# EAGLE board Digital BMS Slave board  (EAGLE 9.5.1)
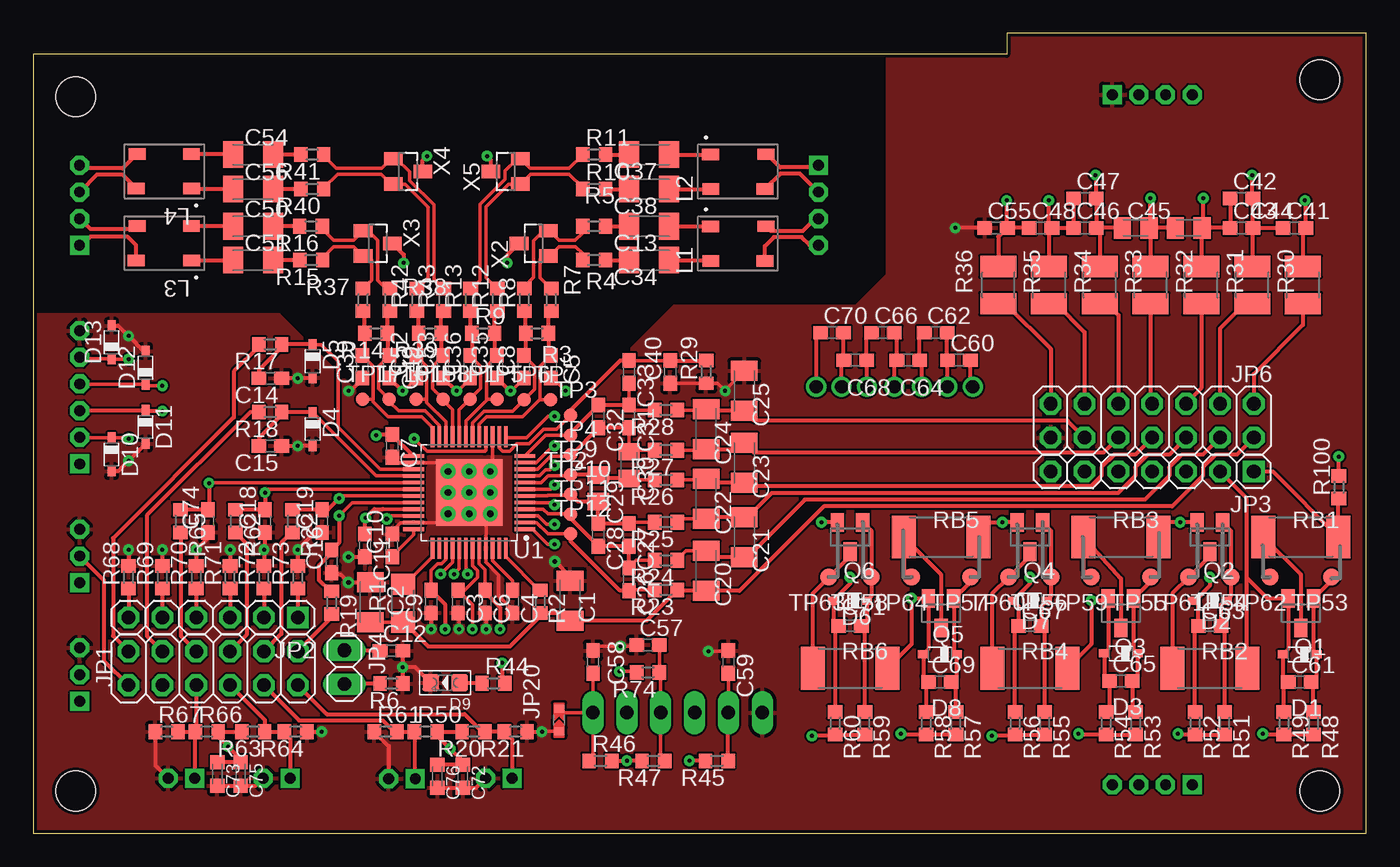
[diagram p0: board, top side]
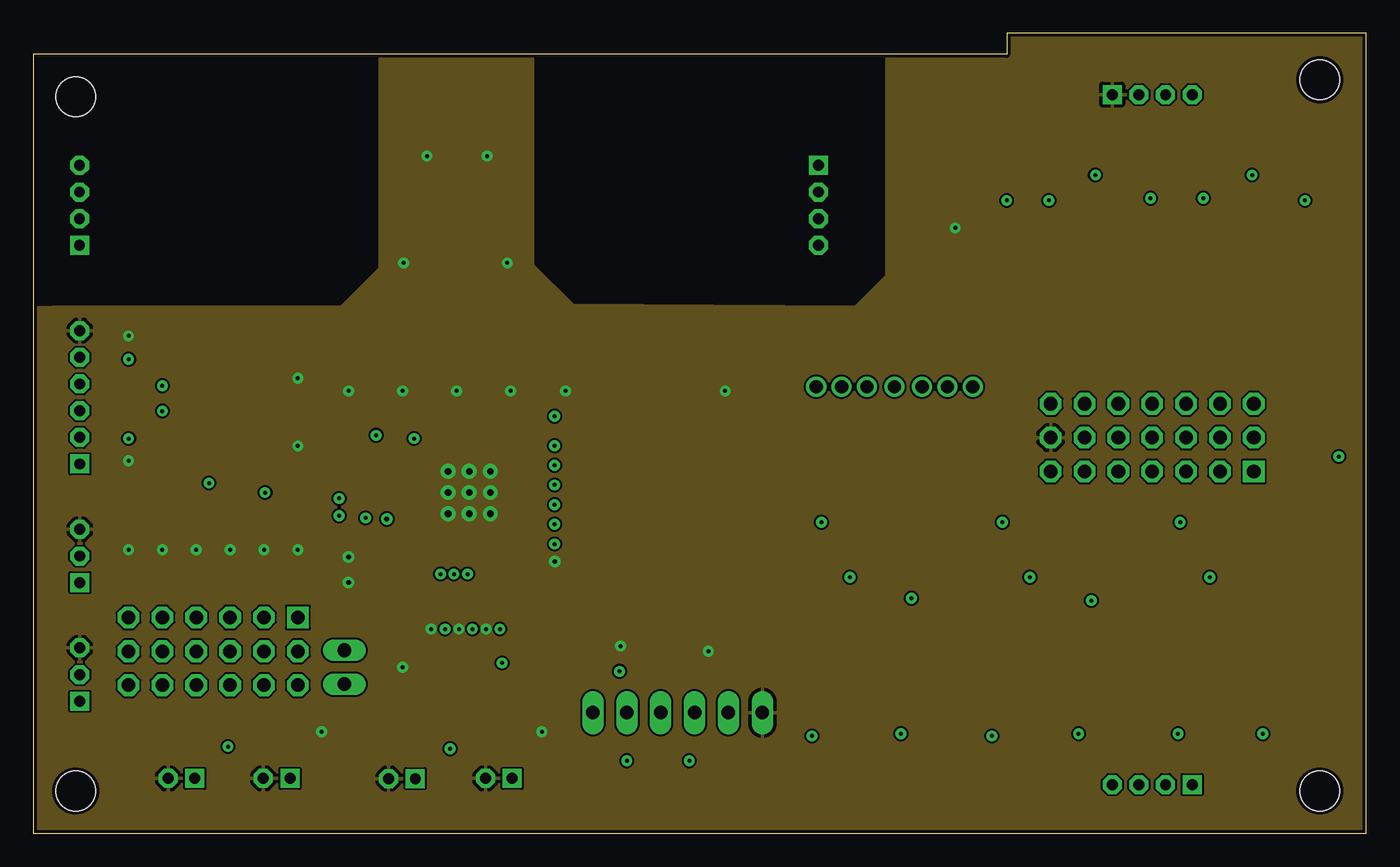
[diagram p1: board, inner layer GND_plane]
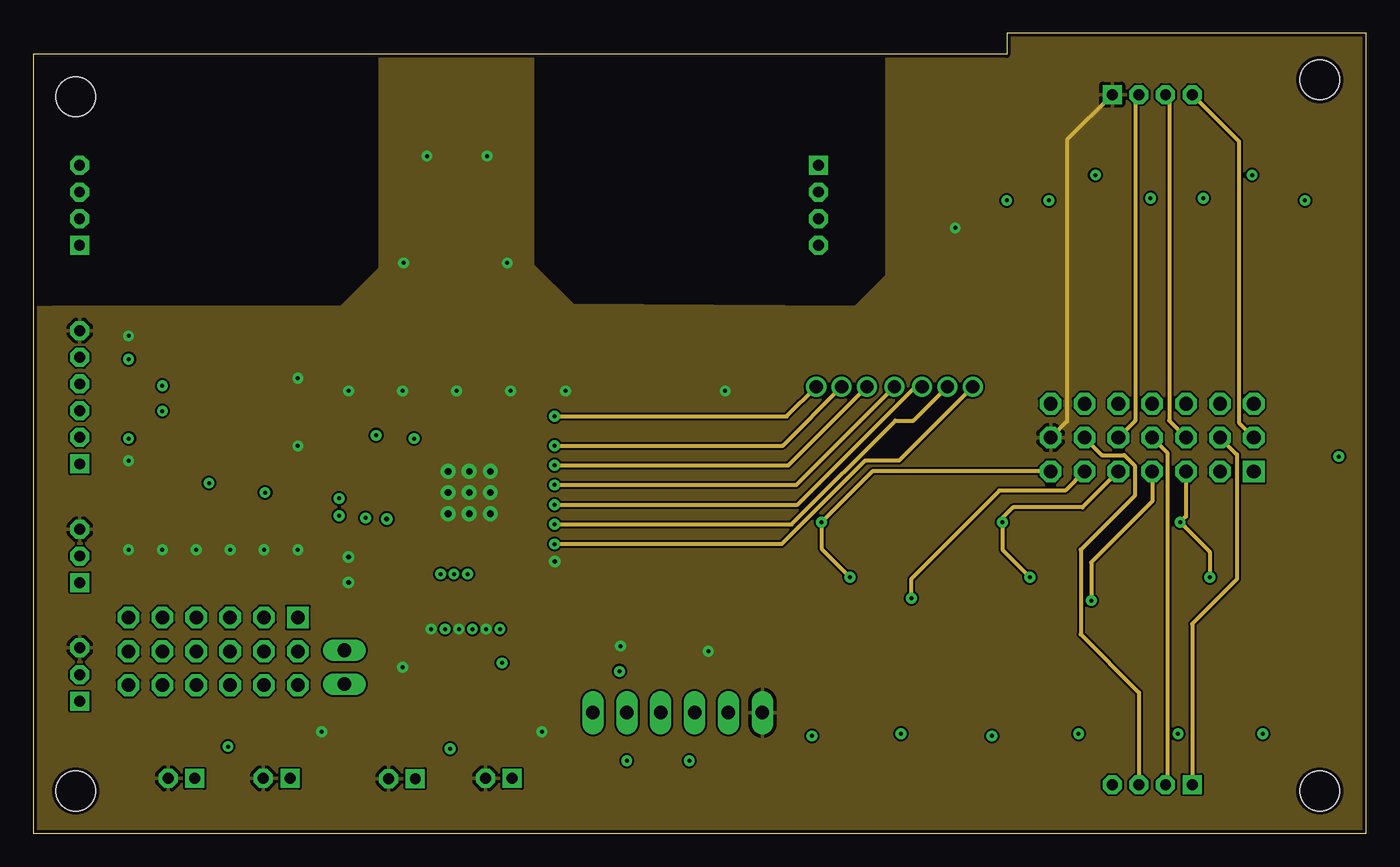
[diagram p2: board, inner layer Signal]
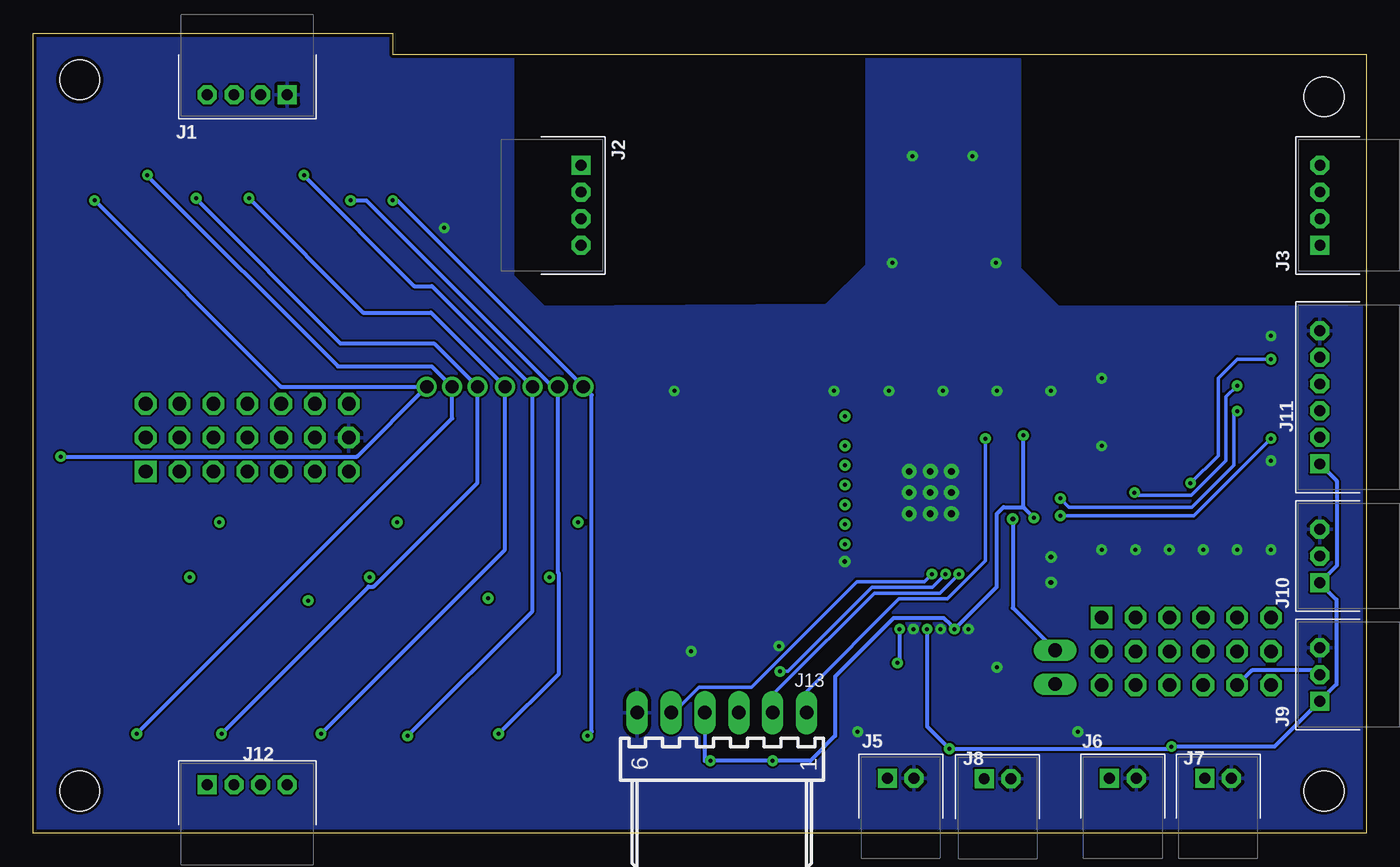
[diagram p3: board, bottom side, seen from below]

Size 100 x 60 mm. Coordinates in mm from the lower left corner, seen from the top.
Outline: 0,0 100,0 100,60 73.03,60 73.03,58.42 0,58.41 0,0
Copper layers (1+2*15+16): Top 0.035mm / dielectric 0.11mm / GND_plane 0.035mm / dielectric 1.13mm / Signal 0.035mm / dielectric 0.11mm / Bottom 0.035mm
Design rules "Pcb_Way_design_rules": minimum track width 6mil, minimum drill 0.3mm, track to track 6mil, track to pad 6mil, pad to pad 6mil, via to via 6mil, smd to smd 6mil, copper to edge 10mil, drill to drill 8mil, minimum pad ring 12mil, minimum via ring 10mil, stop-mask expansion 4mil, vias tented up to drill 25mil, thermal gap 10mil
Holes 3 mm at 3.17,3.17 96.52,3.17 96.52,56.52 3.17,55.24

## Footprints (pad centres in the part's own frame; a part is rotated, then mirrored left to right if it is on the bottom)
C1206K = smd 1.5 x 2: 1 -1.5,0; 2 1.5,0
C0603 = smd 1.1 x 1: 1 -0.85,0; 2 0.85,0
C0805K = smd 1.3 x 1.6: 1 -1,0; 2 1,0
C0603K-X = smd 1.05 x 1.08: 1 -0.875,0; 2 0.875,0
SOD323_ST = smd 0.8 x 0.6: A 1.25,0; C -1.25,0
LED-0805 = smd 1.27 x 1.27: + -1.079,0; - 1.079,0
S4B-PH-K = drill 0.813 square: 1 -3,0 | drill 0.813 octagon: 2 -1,0; 3 1,0; 4 3,0
S2B-PH-K = drill 0.813 square: 1 -1,0 | drill 0.813 octagon: 2 1,0
S3B-PH-K = drill 0.813 square: 1 -2,0 | drill 0.813 octagon: 2 0,0; 3 2,0
S6B-PH-K = drill 0.813 square: 1 -5,0 | drill 0.813 octagon: 2 -3,0; 3 -1,0; 4 1,0; 5 3,0; 6 5,0
7395-06 = drill 1.016 long: 1 6.35,0; 2 3.81,0; 3 1.27,0; 4 -1.27,0; 5 -3.81,0; 6 -6.35,0
2X06 = drill 1.016 octagon: 1 -6.35,-1.27; 2 -6.35,1.27; 3 -3.81,-1.27; 4 -3.81,1.27; 5 -1.27,-1.27; 6 -1.27,1.27; 7 1.27,-1.27; 8 1.27,1.27; 9 3.81,-1.27; 10 3.81,1.27; 11 6.35,-1.27; 12 6.35,1.27
1X06 = drill 1.016 square: 1 -6.35,0 | drill 1.016 octagon: 2 -3.81,0; 3 -1.27,0; 4 1.27,0; 5 3.81,0; 6 6.35,0
1X07 = drill 1.016 square: 1 -7.62,0 | drill 1.016 octagon: 2 -5.08,0; 3 -2.54,0; 4 0,0; 5 2.54,0; 6 5.08,0; 7 7.62,0
1X02 = drill 1.016 long: 1 -1.27,0; 2 1.27,0
2X07 = drill 1.016 octagon: 1 -7.62,-1.27; 2 -7.62,1.27; 3 -5.08,-1.27; 4 -5.08,1.27; 5 -2.54,-1.27; 6 -2.54,1.27; 7 0,-1.27; 8 0,1.27; 9 2.54,-1.27; 10 2.54,1.27; 11 5.08,-1.27; 12 5.08,1.27; 13 7.62,-1.27; 14 7.62,1.27
SOLDER_BRIDGE = smd 0.592 x 0.746: 1 -0.85,0; 2 0.85,0
ACT45B = smd 0.857 x 1.265: 1 1.297,2.054; 2 -1.303,2.046; 3 -1.297,-2.014; 4 1.303,-2.106
SOT23 = smd 1 x 1.4: 1 -0.95,-1.1; 2 0.95,-1.1; 3 0,1.1
R1206 = smd 1.6 x 1.803: 1 -1.422,0; 2 1.422,0
R0603 = smd 1 x 1.1: 1 -0.85,0; 2 0.85,0
R0603-X = smd 1 x 1.1: 1 -0.85,0; 2 0.85,0
R1210 = smd 1.6 x 2.7: 1 -1.4,0; 2 1.4,0
R2512 = smd 1.8 x 3.2: 1 -2.8,0; 2 2.8,0
TP1MM_MASK = smd 1.016 x 1.016: 1 0,0
TP1.27MM = smd 1.27 x 1.27: 1 0,0
HTQFP48-9X9MM-VIA = smd 1.559 x 0.28: 1 -4.178,2.75; 2 -4.178,2.25; 3 -4.178,1.75; 4 -4.178,1.25; 5 -4.178,0.75; 6 -4.178,0.25; 7 -4.178,-0.25; 8 -4.178,-0.75; 9 -4.178,-1.25; 10 -4.178,-1.75; 11 -4.178,-2.25; 12 -4.178,-2.75; 25 4.178,-2.75; 26 4.178,-2.25; 27 4.178,-1.75; 28 4.178,-1.25; 29 4.178,-0.75; 30 4.178,-0.25; 31 4.178,0.25; 32 4.178,0.75; 33 4.178,1.25; 34 4.178,1.75; 35 4.178,2.25; 36 4.178,2.75 | smd 0.28 x 1.559: 13 -2.75,-4.178; 14 -2.25,-4.178; 15 -1.75,-4.178; 16 -1.25,-4.178; 17 -0.75,-4.178; 18 -0.25,-4.178; 19 0.25,-4.178; 20 0.75,-4.178; 21 1.25,-4.178; 22 1.75,-4.178; 23 2.25,-4.178; 24 2.75,-4.178; 37 2.75,4.178; 38 2.25,4.178; 39 1.75,4.178; 40 1.25,4.178; 41 0.75,4.178; 42 0.25,4.178; 43 -0.25,4.178; 44 -0.75,4.178; 45 -1.25,4.178; 46 -1.75,4.178; 47 -2.25,4.178; 48 -2.75,4.178 | smd 5 x 5: 49 0,0 | drill 0.5: 491 -1.587,1.587; 492 0,1.587; 493 1.587,1.587; 494 -1.587,0; 495 0,0; 496 1.587,0; 497 -1.587,-1.587; 498 0,-1.587; 499 1.587,-1.587

## Placement (x,y rotation side)
C1  0.33u/50V  [C1206K]  40.27,17.46 270 top
C2  0.33u/50V  [C1206K]  25.28,17.34 90 top
C3  2.2u/10V  [C0603]  31.87,17.38 270 top
C4  2.2u/16V  [C0603]  35.96,17.38 270 top
C5  51p  [C0603]  38.82,34.99 90 top
C6  2.2u/16V  [C0603]  33.89,17.38 270 top
C7  2.2u/16V  [C0603]  26.93,29.05 270 top
C8  51p  [C0603]  36.8,34.99 90 top
C9  2.2u/16V  [C0603]  29.84,17.38 270 top
C10  2.2u/16V  [C0603]  26.93,21.59 90 top
C11  2.2u/16V  [C0603]  24.88,21.59 270 top
C12  1u/16V  [C0603]  26.87,13.69 0 top
C13  2.2n  [C1206K]  46.2,45.53 180 top
C14  1u/16V  [C0603]  17.78,34.13 180 top
C15  1u/16V  [C0603]  17.78,29.05 180 top
C16  1u/16V  [C0603]  22.38,20.4 90 top
C18  1u/16V  [C0603]  17.38,23.42 90 top
C19  1u/16V  [C0603]  21.67,23.42 90 top
C20  0.1u/100V  [C1206K]  50.48,19.68 270 top
C21  0.1u/100V  [C1206K]  53.34,22.23 270 top
C22  0.1u/100V  [C1206K]  50.48,25.08 270 top
C23  0.1u/100V  [C1206K]  53.34,27.78 270 top
C24  0.1u/100V  [C1206K]  50.48,30.32 270 top
C25  0.1u/100V  [C1206K]  53.34,33.18 270 top
C26  0.47u/16V  [C0603]  44.69,19.05 270 top
C27  0.47u/16V  [C0603]  44.69,22.38 270 top
C28  0.33u/16V  [C0603]  42.39,22.38 270 top
C29  1u/16V  [C0805K]  42.39,25.88 270 top
C30  1u/16V  [C0805K]  44.69,27.62 270 top
C31  0.47u/16V  [C0603]  44.69,31.27 270 top
C32  0.33u/16V  [C0603]  42.39,31.27 270 top
C33  0.47u/16V  [C0603]  44.69,34.61 270 top
C34  2.2n  [C1206K]  46.2,43 180 top
C35  51p  [C0603]  34.79,34.99 90 top
C36  51p  [C0603]  32.77,34.99 90 top
C37  2.2n  [C1206K]  46.2,50.91 180 top
C38  2.2n  [C1206K]  46.2,48.31 180 top
C39  51p  [C0603]  24.69,34.99 90 top
C40  0.47u/16V  [C0603]  47.78,34.61 90 top
C41  0.47u/16V  [C0603]  94.61,45.4 0 top
C42  0.33u/16V  [C0603]  90.65,47.62 0 top
C43  0.47u/16V  [C0603]  90.65,45.4 0 top
C44  1u/16V  [C0805K]  86.68,45.4 0 top
C45  1u/16V  [C0805K]  82.71,45.4 0 top
C46  0.33u/16V  [C0603]  78.9,45.4 0 top
C47  0.47u/16V  [C0603]  78.9,47.62 0 top
C48  0.47u/16V  [C0603]  75.56,45.4 0 top
C49  51p  [C0603]  26.71,34.99 90 top
C50  2.2n  [C1206K]  16.48,45.53 0 top
C51  2.2n  [C1206K]  16.48,43 0 top
C52  51p  [C0603]  28.73,34.99 90 top
C53  51p  [C0603]  30.75,34.99 90 top
C54  2.2n  [C1206K]  16.48,50.91 0 top
C55  0.47u/16V  [C0603]  72.23,45.4 0 top
C56  2.2n  [C1206K]  16.48,48.31 0 top
C57  51p  [C0603]  46.12,14.13 0 top
C58  1nF  [C0603]  41.99,12.86 270 top
C59  1nF  [C0603]  52.15,12.86 270 top
C60  1u/16V  [C0603]  69.45,35.48 0 top
C61  1u/16V  [C0603]  95.01,11.35 0 top
C62  1u/16V  [C0603]  67.71,37.54 0 top
C63  1u/16V  [C0603]  88.27,15.56 0 top
C64  1u/16V  [C0603]  65.64,35.48 0 top
C65  1u/16V  [C0603]  81.6,11.43 0 top
C66  1u/16V  [C0603]  63.74,37.54 0 top
C67  1u/16V  [C0603]  74.77,15.56 0 top
C68  1u/16V  [C0603]  61.67,35.48 0 top
C69  1u/16V  [C0603]  68.02,11.35 0 top
C70  1u/16V  [C0603]  59.93,37.54 0 top
C71  1u/16V  [C0603]  61.28,15.56 0 top
C72  1u/16V  [C0603K-X]  32.23,4.29 270 top
C73  1u/16V  [C0603K-X]  13.81,4.45 270 top
C74  1u/16V  [C0603]  13.1,23.42 90 top
C75  1u/16V  [C0603K-X]  15.56,4.45 270 top
C76  1u/16V  [C0603K-X]  30.32,4.29 270 top
D1  6.2V  [SOD323_ST]  95.01,13.41 180 top
D2  6.2V  [SOD323_ST]  88.27,17.46 180 top
D3  6.2V  [SOD323_ST]  81.6,13.49 180 top
D4  6.2V  [SOD323_ST]  20.95,30.32 270 top
D5  6.2V  [SOD323_ST]  20.95,35.4 270 top
D6  6.2V  [SOD323_ST]  61.28,17.46 180 top
D7  6.2V  [SOD323_ST]  74.77,17.46 180 top
D8  6.2V  [SOD323_ST]  68.02,13.41 180 top
D9  GREEN  [LED-0805]  30.9,11.3 180 top
D10  6.2V  [SOD323_ST]  5.87,28.42 270 top
D11  6.2V  [SOD323_ST]  8.41,30.48 270 top
D12  6.2V  [SOD323_ST]  8.41,34.92 90 top
D13  6.2V  [SOD323_ST]  5.87,36.83 90 top
J1  S4B-PH-K  [S4B-PH-K]  83.95,55.4 180 bottom
J2  S4B-PH-K  [S4B-PH-K]  58.9,47.1 270 bottom
J3  S4B-PH-K  [S4B-PH-K]  3.47,47.1 90 bottom
J5  S2B-PH-K  [S2B-PH-K]  34.92,4.13 0 bottom
J6  S2B-PH-K  [S2B-PH-K]  18.26,4.13 0 bottom
J7  S2B-PH-K  [S2B-PH-K]  11.11,4.13 0 bottom
J8  S2B-PH-K  [S2B-PH-K]  27.66,4.1 0 bottom
J9  S3B-PH-K  [S3B-PH-K]  3.49,11.91 90 bottom
J10  S3B-PH-K  [S3B-PH-K]  3.49,20.8 90 bottom
J11  S6B-PH-K  [S6B-PH-K]  3.49,32.7 90 bottom
J12  S4B-PH-K  [S4B-PH-K]  83.95,3.65 0 bottom
J13  MOLEX22-12-406205-7068  [7395-06]  48.34,9.05 0 bottom
JP1  [2X06]  13.49,12.38 0 top
JP2  [1X06]  13.49,16.19 180 top
JP3  1x7  [1X07]  83.95,27.14 180 top
JP4  [1X02]  23.34,12.46 270 top
JP6  2x7  [2X07]  83.95,30.95 180 top
JP20  SOLDER_BRIDGE  [SOLDER_BRIDGE]  39.45,8.49 90 top
L1  100uH  [ACT45B]  52.87,44.23 90 top
L2  100uH  [ACT45B]  52.87,49.63 90 top
L3  100uH  [ACT45B]  9.82,44.25 270 top
L4  100uH  [ACT45B]  9.82,49.65 270 top
Q1  BSS123  [SOT23]  95.09,16.51 180 top
Q2  BSS123  [SOT23]  88.27,22.23 180 top
Q3  BSS123  [SOT23]  81.6,16.51 180 top
Q4  BSS123  [SOT23]  74.77,22.23 180 top
Q5  BSS123  [SOT23]  68.1,16.51 180 top
Q6  BSS123  [SOT23]  61.28,22.23 180 top
R1  47, 0.25W  [R1206]  27.74,17.26 270 top
R2  100  [R0603]  38.02,17.38 270 top
R3  10k  [R0603]  37.8,37.5 0 top
R4  10  [R0603]  42.08,43 0 top
R5  10  [R0603]  42.08,45.53 0 top
R6  100k  [R0603]  26.87,11.23 180 top
R7  43  [R0603]  38.86,40.02 90 top
R8  43  [R0603]  36.84,40.02 90 top
R9  10k  [R0603]  33.76,37.5 0 top
R10  10  [R0603]  42.08,48.31 0 top
R11  10  [R0603]  42.08,50.91 0 top
R12  43  [R0603]  34.82,40.02 90 top
R13  43  [R0603]  32.8,40.02 90 top
R14  10k  [R0603]  25.72,37.5 180 top
R15  10  [R0603]  20.85,43 180 top
R16  10  [R0603]  20.83,45.53 180 top
R17  1k  [R0603]  17.78,36.67 180 top
R18  1k  [R0603]  17.78,31.59 180 top
R19  1k  [R0603]  22.38,17.3 270 top
R20  100k  [R0603]  33.02,7.62 180 top
R21  [R0603-X]  36.2,7.62 180 top
R22  1k  [R0603]  19.45,23.42 270 top
R23  47  [R0603]  47.47,18.26 180 top
R24  47  [R0603]  47.47,20.48 180 top
R25  47  [R0603]  47.47,23.34 180 top
R26  47  [R0603]  47.47,26.51 180 top
R27  47  [R0603]  47.47,28.73 180 top
R28  47  [R0603]  47.47,31.75 180 top
R29  47  [R0603]  50.48,34.61 90 top
R30  10, 1/4W  [R1210]  95.25,41.12 90 top
R31  10, 1/4W  [R1210]  91.44,41.12 90 top
R32  10, 1/4W  [R1210]  87.63,41.12 90 top
R33  10, 1/4W  [R1210]  83.82,41.12 90 top
R34  10, 1/4W  [R1210]  80.01,41.12 90 top
R35  10, 1/4W  [R1210]  76.2,41.12 90 top
R36  10, 1/4W  [R1210]  72.39,41.12 90 top
R37  43  [R0603]  24.73,40.02 90 top
R38  43  [R0603]  26.75,40.02 90 top
R39  10k  [R0603]  29.76,37.5 180 top
R40  10  [R0603]  20.93,48.31 180 top
R41  10  [R0603]  20.93,50.91 180 top
R42  43  [R0603]  28.77,40.02 90 top
R43  43  [R0603]  30.78,40.02 90 top
R44  1k  [R0603]  34.51,11.26 0 top
R45  10k  [R0603]  51.28,5.44 180 top
R46  10k  [R0603]  42.55,5.44 0 top
R47  10k  [R0603]  46.51,5.44 180 top
R48  1k  [R0603]  96.04,8.26 270 top
R49  100  [R0603]  93.82,8.26 270 top
R50  100k  [R0603]  29.45,7.62 0 top
R51  1k  [R0603]  89.38,8.26 270 top
R52  100  [R0603]  87.15,8.26 270 top
R53  1k  [R0603]  82.71,8.26 270 top
R54  100  [R0603]  80.49,8.26 270 top
R55  1k  [R0603]  75.88,8.26 270 top
R56  100  [R0603]  73.66,8.26 270 top
R57  1k  [R0603]  69.22,8.26 270 top
R58  100  [R0603]  66.99,8.26 270 top
R59  1k  [R0603]  62.39,8.26 270 top
R60  100  [R0603]  60.17,8.26 270 top
R61  [R0603-X]  26.43,7.62 0 top
R62  1k  [R0603]  15.16,23.42 270 top
R63  10k  [R0603]  16.51,7.62 180 top
R64  [R0603-X]  19.68,7.62 180 top
R65  1k  [R0603]  11.03,23.42 270 top
R66  10k  [R0603]  13.02,7.62 0 top
R67  [R0603-X]  10,7.62 0 top
R68  10k  [R0603]  7.14,19.21 90 top
R69  10k  [R0603]  9.68,19.21 90 top
R70  10k  [R0603]  12.22,19.21 90 top
R71  10k  [R0603]  14.76,19.21 90 top
R72  10k  [R0603]  17.3,19.21 90 top
R73  10k  [R0603]  19.84,19.21 90 top
R74  100  [R0603]  46.12,12.06 180 top
R100  100  [R0603]  97.95,25.96 90 top
RB1  20  [R2512]  95.09,22.23 0 top
RB2  20  [R2512]  88.27,12.38 0 top
RB3  20  [R2512]  81.6,22.23 0 top
RB4  20  [R2512]  74.77,12.38 0 top
RB5  20  [R2512]  68.1,22.23 0 top
RB6  20  [R2512]  61.28,12.38 0 top
TP1  TEST_PAD-[1MM]  [TP1MM_MASK]  32.77,32.54 0 top
TP2  TEST_PAD-[1MM]  [TP1MM_MASK]  40.32,29.87 180 top
TP3  TEST_PAD-[1MM]  [TP1MM_MASK]  40.32,31.35 0 top
TP4  TEST_PAD-[1MM]  [TP1MM_MASK]  40.32,28.39 0 top
TP5  TEST_PAD-[1MM]  [TP1MM_MASK]  34.79,32.54 0 top
TP6  TEST_PAD-[1MM]  [TP1MM_MASK]  36.8,32.5 0 top
TP7  TEST_PAD-[1MM]  [TP1MM_MASK]  38.82,32.5 0 top
TP8  TEST_PAD-[1MM]  [TP1MM_MASK]  30.75,32.54 0 top
TP9  TEST_PAD-[1MM]  [TP1MM_MASK]  40.32,26.91 0 top
TP10  TEST_PAD-[1MM]  [TP1MM_MASK]  40.32,25.43 0 top
TP11  TEST_PAD-[1MM]  [TP1MM_MASK]  40.32,23.94 0 top
TP12  TEST_PAD-[1MM]  [TP1MM_MASK]  40.32,22.46 0 top
TP15  TEST_PAD-[1MM]  [TP1MM_MASK]  28.73,32.54 0 top
TP16  TEST_PAD-[1MM]  [TP1MM_MASK]  26.71,32.54 0 top
TP17  TEST_PAD-[1MM]  [TP1MM_MASK]  24.69,32.54 0 top
TP53  TEST_PAD-[1.27MM]  [TP1.27MM]  97.39,19.21 180 top
TP54  TEST_PAD-[1.27MM]  [TP1.27MM]  89.85,19.21 180 top
TP55  TEST_PAD-[1.27MM]  [TP1.27MM]  83.82,19.21 180 top
TP56  TEST_PAD-[1.27MM]  [TP1.27MM]  76.36,19.21 180 top
TP57  TEST_PAD-[1.27MM]  [TP1.27MM]  70.33,19.21 180 top
TP58  TEST_PAD-[1.27MM]  [TP1.27MM]  62.87,19.21 180 top
TP59  TEST_PAD-[1.27MM]  [TP1.27MM]  79.38,19.21 180 top
TP60  TEST_PAD-[1.27MM]  [TP1.27MM]  73.18,19.21 180 top
TP61  TEST_PAD-[1.27MM]  [TP1.27MM]  86.68,19.21 180 top
TP62  TEST_PAD-[1.27MM]  [TP1.27MM]  92.79,19.21 180 top
TP63  TEST_PAD-[1.27MM]  [TP1.27MM]  59.69,19.21 180 top
TP64  TEST_PAD-[1.27MM]  [TP1.27MM]  65.88,19.21 180 top
U1  BQ79606A-Q1-HTQFP|48|9VIA  [HTQFP48-9X9MM-VIA]  32.7,25.56 180 top
X2  PESD2CAN  [SOT23]  37.54,44.24 90 top
X3  PESD2CAN  [SOT23]  25.84,44.24 270 top
X4  PESD2CAN  [SOT23]  28.11,49.64 270 top
X5  PESD2CAN  [SOT23]  35.44,49.64 90 top

## Library data of the parts
C1 C2 C13 C20-C25 C29 C30 C34 C37 C38 C44 C45 C50 C51 C54 C56 C72 C73 C75 C76 = Capacitors
C3-C12 C14-C16 C18 C19 C26-C28 C31-C33 C35 C36 C39-C43 C46-C49 C52 C53 C55 C57-C71 C74 R2-R5 R7-R19 R22-R43 R45-R49 R51-R60 R62 R65 R74 R100 = resistor
D1-D13 = Semiconductor_devices
J1-J3 J5-J12 = con-jst-ph
J13 = commonly used connectors; MF: MOLEX; OC_FARNELL: unknown; OC_NEWARK: unknown
JP1 JP4 JP6 = pinhead
JP2 JP3 = commonly used connectors
JP20 TP1-TP12 TP15-TP17 TP53-TP64 = testing
L1-L4 = Inductors
Q1-Q6 = transistor-small-signal
R1 R6 R20 R21 R44 R50 R61 R63 R64 R66-R73 RB1-RB6 = Resistors
U1 = texas Instrumets
X2-X5 = stmicroelectronics

## Nets
4: J12.4
AVDD: C6.1 R44.2 U1.44
BAT: R2.1 U1.48
BAT1: C24.1 C25.2 J12.3 JP6.12 R28.1
BAT2: C23.1 C24.2 J1.2 JP6.10 R27.1
BAT3: C22.1 C23.2 J12.2 JP6.8 R26.1
BAT4: C21.1 C22.2 J1.3 JP6.6 R25.1
BAT5: C20.1 C21.2 J12.1 JP6.4 R24.1
CB0: C48.1 C55.2 C70.1 R36.2 R59.2 R60.2 U1.13
CB1: C46.1 C47.1 C48.2 C68.1 C70.2 R35.2 R57.2 R58.2 U1.11
CB2: C45.1 C46.2 C47.2 C66.1 C68.2 R34.2 R55.2 R56.2 U1.9
CB3: C44.1 C45.2 C64.1 C66.2 R33.2 R53.2 R54.2 U1.7
CB4: C42.1 C43.1 C44.2 C62.1 C64.2 R32.2 R51.2 R52.2 U1.5
CB5: C41.1 C42.2 C43.2 C60.1 C62.2 R31.2 R48.2 R49.2 U1.3
CB6: C41.2 C60.2 R30.2 R100.2 U1.1
CH1_N: C54.2 R41.2
CH1_P: C56.2 R40.2
CH2_N: C54.1 L4.2
CH2_P: C56.1 L4.1
CH_N: R41.1 R43.2 X4.1
CH_P: R40.1 R42.2 X4.2
CL1_N: C37.2 R11.2
CL1_P: C38.2 R10.2
CL2_N: C37.1 L2.1
CL2_P: C38.1 L2.2
CL_N: R11.1 R13.2 X5.2
CL_P: R10.1 R12.2 X5.1
COMH_N: C53.2 R39.1 R43.1 TP8.1 U1.21
COMH_P: C52.2 R39.2 R42.1 TP15.1 U1.22
COML_N: C36.2 R9.1 R13.1 TP1.1 U1.20
COML_P: C35.2 R9.2 R12.1 TP5.1 U1.19
DVDD: C10.1 U1.36
EB0: C71.1 D6.A JP3.7 Q6.2 R60.1
EB1: C69.1 D8.A JP3.6 Q5.2 R58.1 RB6.2
EB2: C67.1 D7.A JP3.5 Q4.2 R56.1 RB5.2
EB3: C65.1 D3.A JP3.4 Q3.2 R54.1 RB4.2
EB4: C63.1 D2.A JP3.3 Q2.2 R52.1 RB3.2
EB5: C61.1 D1.A JP3.2 Q1.2 R49.1 RB2.2
EB6: JP3.1 R100.1 RB1.2
FAULTH_N: C49.2 R14.1 R38.1 TP16.1 U1.23
FAULTH_P: C39.2 R14.2 R37.1 TP17.1 U1.24
FAULTL_N: C8.2 R3.1 R8.1 TP6.1 U1.18
FAULTL_P: C5.2 R3.2 R7.1 TP7.1 U1.17
FH1_N: C50.2 R16.2
FH1_P: C51.2 R15.2
FH2_N: C50.1 L3.2
FH2_P: C51.1 L3.1
FH_N: R16.1 R38.2 X3.1
FH_P: R15.1 R37.2 X3.2
FL1_N: C13.2 R5.2
FL1_P: C34.2 R4.2
FL2_N: C13.1 L1.1
FL2_P: C34.1 L1.2
FL_N: R5.1 R8.2 X2.2
FL_P: R4.1 R7.2 X2.1
GND: C1.1 C2.2 C3.2 C4.2 C5.1 C6.2 C7.2 C8.1 C9.2 C10.2 C11.2 C12.2 C14.1 C15.1 C16.1 C18.1 C19.1 C25.1 C35.1 C36.1 C39.1 C40.1 C49.1 C52.1 C53.1 C55.1 C57.1 C58.1 C59.1 C72.2 C73.2 C74.1 C75.2 C76.2 D4.A D5.A D9.- D10.A D11.A D12.A D13.A J1.1 J5.2 J6.2 J7.2 J8.2 J9.3 J10.3 J11.6 J13.6 JP6.14 JP20.1 R6.1 R21.1 R29.1 R61.1 R64.1 R67.1 R68.2 R69.2 R70.2 R71.2 R72.2 R73.2 U1.15 U1.26 U1.35 U1.45 U1.49 U1.491 U1.492 U1.493 U1.494 U1.495 U1.496 U1.497 U1.498 U1.499 X2.3 X3.3 X4.3 X5.3
GPIO1: C14.2 D5.C R17.1 U1.27
GPIO1F: JP1.2 R17.2
GPIO1V2: J10.2 JP1.1
GPIO2: C15.2 D4.C R18.1 U1.28
GPIO2F: JP1.4 R18.2
GPIO2V1: J9.2 JP1.3
GPIO3: C74.2 D13.C J11.5 R65.1 U1.29
GPIO3F: JP1.6 R65.2
GPIO3T4: J7.1 JP1.5 R66.1 R67.2
GPIO4: C18.2 D12.C J11.4 R62.1 U1.30
GPIO4F: JP1.8 R62.2
GPIO4T3: J6.1 JP1.7 R63.1 R64.2
GPIO5: C19.2 D11.C J11.3 R22.1 U1.31
GPIO5F: JP1.10 R22.2
GPIO5T2: J8.1 JP1.9 R50.1 R61.2
GPIO6: C16.2 D10.C J11.2 R19.1 U1.32
GPIO6F: JP1.12 R19.2
GPIO6T1: J5.1 JP1.11 R20.1 R21.2
ISO_COMH_N: J3.4 L4.3
ISO_COMH_P: J3.3 L4.4
ISO_COML_N: J2.1 L2.4
ISO_COML_P: J2.2 L2.3
ISO_FAULTH_N: J3.2 L3.3
ISO_FAULTH_P: J3.1 L3.4
ISO_FAULTL_N: J2.3 L1.4
ISO_FAULTL_P: J2.4 L1.3
LDOIN: R1.1 U1.37
N$2: JP4.2 R6.2
N$3: Q1.3 RB1.1 TP62.1
N$12: JP2.1 R73.1
N$19: JP2.2 R72.1
N$20: JP2.3 R71.1
N$21: JP2.4 R70.1
N$22: Q3.3 RB3.1 TP59.1
N$23: JP2.5 R69.1
N$24: JP2.6 R68.1
N$28: D9.+ R44.1
N$30: C61.2 D1.C Q1.1 R48.1 TP53.1
N$31: Q2.3 RB2.1 TP61.1
N$34: Q5.3 RB5.1 TP64.1
N$60: C63.2 D2.C Q2.1 R51.1 TP54.1
N$62: C65.2 D3.C Q3.1 R53.1 TP55.1
N$63: Q4.3 RB4.1 TP60.1
N$68: C67.2 D7.C Q4.1 R55.1 TP56.1
N$70: C69.2 D8.C Q5.1 R57.1 TP57.1
N$71: Q6.3 RB6.1 TP63.1
N$76: C71.2 D6.C Q6.1 R59.1 TP58.1
NFAULT: C59.2 J13.5 R45.1 U1.42
REF1: C4.1 U1.46
RX: R74.2 U1.41
RX1: C57.2 J13.3 R47.1 R74.1
SB0: JP6.13 R36.1
SB1: JP6.11 R35.1
SB2: JP6.9 R34.1
SB3: JP6.7 R33.1
SB4: JP6.5 R32.1
SB5: JP6.3 R31.1
SB6: JP6.1 R30.1
TSREF: C3.1 C72.1 C73.1 C75.1 C76.1 J9.1 J10.1 J11.1 R20.2 R50.2 R63.2 R66.2 U1.43
TX: J13.2 U1.40
VC0: C33.1 C40.2 R29.2 TP3.1 U1.14
VC1: C31.1 C32.1 C33.2 R28.2 TP2.1 U1.12
VC2: C30.1 C31.2 C32.2 R27.2 TP4.1 U1.10
VC3: C29.1 C30.2 R26.2 TP9.1 U1.8
VC4: C27.1 C28.1 C29.2 R25.2 TP10.1 U1.6
VC5: C26.1 C27.2 C28.2 R24.2 TP11.1 U1.4
VC6: C26.2 R23.2 TP12.1 U1.2
VCC: C1.2 C2.1 C20.2 J1.4 JP6.2 R1.2 R2.2 R23.1
VIO: C7.1 C9.1 C11.1 J13.4 R45.2 R46.2 R47.2 U1.25 U1.33 U1.39
VPROG: C12.1 JP4.1 U1.34
WAKEUP: C58.2 J13.1 JP20.2 R46.1 U1.16

## Tracks (layer width: path | path; a pad name or v marks a point on that pad's centre or on a via)
AVDD  (via drill 0.3)
  Top 0.279: C6.1 33.91,18.25 33.91,19.75 33.45,20.21 U1.44
  Top 0.305: C6.1 33.89,18.07 35,16.96 v35,15.32 | v35.16,12.78 35.16,11.46 R44.2
  Bottom 0.305: v35,15.32 35,12.94 v35.16,12.78
BAT
  Top 0.279: R2.1 37.96,18.23 35.45,20.74 U1.48
BAT1
  Top 0.279: R28.1 50.41,31.75 C24.1
  Top 0.305: C24.1 50.62,31.68 C25.2 54.07,30.95 77.6,30.95 JP6.12
  Signal 0.305: J12.3 82.95,10.56 78.58,14.92 78.58,21.27 82.63,25.32 82.63,27.58 81.85,28.36 80.18,28.36 JP6.12
BAT2
  Top 0.279: R27.1 50.4,28.73 C24.2
  Top 0.305: C24.2 52.88,28.82 C23.1 54.06,28.56 80.29,28.56 JP6.10
  Signal 0.305: J1.2 82.68,55.13 82.68,30.95 JP6.10
BAT3
  Top 0.279: R26.1 50.41,26.51 C22.1
  Top 0.305: C22.1 50.78,26.28 C23.2 53.6,26.02 79.33,26.02 80.14,26.83 80.14,27.45 81.1,28.41 82.68,28.41 JP6.8
  Signal 0.305: JP6.8 85.06,28.56 85.06,3.77 J12.2
BAT4
  Top 0.279: R25.1 48.56,23.58 C22.2
  Top 0.305: C22.2 50.62,23.73 C21.1 53.59,23.73 55.39,25.52 81.37,25.52 82.68,26.83 82.68,27.45 83.64,28.41 85.22,28.41 JP6.6
  Signal 0.305: J1.3 85.22,55.13 85.22,30.95 JP6.6
BAT5
  Top 0.279: R24.1 48.32,20.53 48.97,21.18 C20.1
  Top 0.305: C20.1 50.94,20.73 C21.2 53.59,20.73 57.89,25.02 83.41,25.02 85.22,26.83 85.22,27.45 86.18,28.41 87.76,28.41 JP6.4
  Signal 0.305: JP6.4 90.3,28.41 90.3,19.07 86.95,15.72 J12.1
CB0  (via drill 0.3, 1)
  Top 0.279: U1.13 35.53,29.66 37.01,29.66 38.62,31.27 v39.12,31.27
  Top 0.305: C48.1 C55.2 | C55.2 73.03,45.4 72.39,44.76 R36.2 | R59.2 R60.2 60.06,7.3 v58.42,7.3 | v58.74,33.5 58.74,37.2 C70.1 | C55.2 73.03,45.46 v73.03,47.47
  Signal 0.305: v39.12,31.27 56.51,31.27 v58.74,33.5
  Bottom 0.305: v58.42,7.3 58.1,7.62 58.1,32.86 v58.74,33.5 72.71,47.47 v73.03,47.47
CB1  (via drill 0.3, 1)
  Top 0.279: v39.12,29.08 38.98,29.08 37.71,27.81 U1.11
  Top 0.305: C48.2 C46.1 C47.1 | C48.2 76.2,45.19 R35.2 | v60.64,33.5 60.64,35.3 C68.1 60.78,35.53 C70.2 | v65.09,7.46 65.14,7.41 R58.2 R57.2 | C48.2 76.2,45.62 v76.2,47.47
  Signal 0.305: v39.12,29.08 56.23,29.08 v60.64,33.5
  Bottom 0.305: v65.09,7.46 60.57,11.98 60.57,19.5 60.64,19.58 v60.64,33.5 61.05,33.5 75.02,47.47 v76.2,47.47
CB2  (via drill 0.3, 1)
  Top 0.279: U1.9 37.98,26.81 38.43,27.25 38.77,27.25 v39.12,27.6
  Top 0.305: C45.1 C46.2 | C46.2 80.01,45.14 R34.2 | C46.2 C47.2 79.75,49.31 v79.69,49.37 | v62.55,33.5 62.55,35.46 C68.2 62.52,37.18 C66.1 | R55.2 R56.2 73.56,7.3 v71.91,7.3
  Signal 0.305: v39.12,27.6 56.65,27.6 v62.55,33.5
  Bottom 0.305: v71.91,7.3 62.55,16.67 v62.55,33.5 70.09,41.04 71.41,41.04 79.69,49.32 v79.69,49.37
CB3  (via drill 0.3, 1)
  Top 0.279: U1.7 38.8,25.81 v39.12,26.13
  Top 0.305: C44.1 C45.2 | C45.2 83.82,45.29 R33.2 | v64.61,33.5 64.61,35.3 C64.1 64.79,37.34 C66.2 | R53.2 R54.2 78.48,7.41 v78.42,7.46 | C45.2 83.82,45.51 v83.82,47.62
  Signal 0.305: v39.12,26.13 57.24,26.13 v64.61,33.5
  Bottom 0.305: v78.42,7.46 64.61,21.27 v64.61,33.5 70.17,39.05 75.25,39.05 v83.82,47.62
CB4  (via drill 0.3, 1)
  Top 0.279: U1.5 38.96,24.81 v39.12,24.65
  Top 0.305: C44.2 C43.1 C42.1 | C44.2 87.63,45.35 R32.2 | v66.67,33.5 66.67,35.3 C64.2 66.49,37.18 C62.1 | R51.2 R52.2 85.94,7.41 v85.88,7.46 | C44.2 87.79,45.51 v87.79,47.62
  Signal 0.305: v39.12,24.65 57.34,24.65 66.19,33.5 v66.67,33.5
  Bottom 0.305: v85.88,7.46 74.84,18.5 74.48,18.5 66.67,26.3 v66.67,33.5 69.94,36.76 76.97,36.76 87.79,47.58 v87.79,47.62
CB5  (via drill 0.3, 1)
  Top 0.279: v39.12,23.17 38.52,23.17 37.87,23.82 36.89,23.82 U1.3
  Top 0.305: C43.2 C41.1 | C43.2 C42.2 91.44,47.68 v91.44,49.37 | C43.2 91.44,45.35 R31.2 | v68.58,33.5 68.58,35.46 C60.1 68.56,35.53 C62.2 | R48.2 R49.2 92.29,7.41 v92.23,7.46
  Signal 0.305: v39.12,23.17 56.9,23.17 64.67,30.94 66.03,30.94 v68.58,33.5
  Bottom 0.305: v92.23,7.46 68.58,31.11 v68.58,33.5 70.11,35.03 77.15,35.03 91.44,49.32 v91.44,49.37
CB6  (via drill 0.3, 1)
  Top 0.279: U1.1 37.47,22.81 38.58,21.7 v39.12,21.7
  Top 0.305: R100.2 v97.95,28.26 | R30.2 95.25,45.19 C41.2 95.47,47.41 v95.41,47.47 | v70.48,33.5 70.3,33.68 C60.2
  Signal 0.305: v70.48,33.5 64.95,27.96 62.4,27.96 56.14,21.7 v39.12,21.7
  Bottom 0.305: v97.95,28.26 75.72,28.26 v70.48,33.5 81.44,33.5 v95.41,47.47
CH1_N
  Top 0.305: R41.2 C54.2
CH1_P
  Top 0.305: R40.2 C56.2
CH2_N
  Top 0.305: L4.2 14.94,50.95 C54.1
CH2_P
  Top 0.305: L4.1 14.95,48.35 C56.1
CH_N
  Top 0.279: R43.2 30.73,40.87 30.05,41.55 30.05,47.13 28.22,48.96 28.22,49.6 27.24,50.59 X4.1 26.86,50.59 26.14,49.88 22.71,49.88 21.78,50.81 R41.1
CH_P
  Top 0.279: R42.2 28.82,40.87 29.62,41.67 29.62,46.95 27.88,48.69 X4.2 26.84,48.69 26.08,49.44 22.82,49.44 21.78,48.4 R40.1
CL1_N
  Top 0.305: R11.2 C37.2
CL1_P
  Top 0.305: R10.2 C38.2
CL2_N
  Top 0.305: C37.1 50.8,50.91 L2.1
CL2_P
  Top 0.305: C38.1 L2.2
CL_N
  Top 0.279: R13.2 32.91,40.87 33.53,41.48 33.53,47.16 35.41,49.04 35.41,49.68 36.31,50.59 X5.2 37.27,49.87 40.2,49.87 41.23,50.9 R11.1
CL_P
  Top 0.279: R12.2 34.77,40.87 33.97,41.68 33.97,46.98 35.67,48.69 X5.1 36.59,48.75 36.62,48.75 37.31,49.44 40.19,49.44 41.23,48.41 R10.1
COMH_N
  Top 0.279: TP8.1 30.77,32.56 30.79,32.54 30.77,32.54 | C53.2 29.95,35.05 29.95,33.35 30.77,32.54 | U1.21 31.45,31.77 30.69,32.54 30.77,32.54
  Top 0.305: C53.2 30.61,35.98 R39.1 30.61,38.99 R43.1
COMH_P
  Top 0.279: C52.2 29.52,35.04 29.52,32.46 | U1.22 30.95,30.88 29.52,32.31 29.52,32.46 | TP15.1 29.44,32.54 29.52,32.46
  Top 0.305: C52.2 28.91,36.02 R39.2 28.91,39.03 R42.1
COML_N
  Top 0.279: C36.2 32.83,35.77 33.56,35.05 33.56,33.4 32.77,32.61 TP1.1 32.73,32.54 31.95,31.77 U1.20
  Top 0.305: 32.83,35.77 32.91,35.84 R9.1 32.8,37.61 R13.1
COML_P
  Top 0.279: C35.2 33.99,35.04 33.99,32.56 | U1.19 32.45,30.94 33.99,32.48 33.99,32.56 | 33.99,32.56 34.01,32.54 TP5.1
  Top 0.305: C35.2 34.61,36.02 R9.2 34.61,38.95 R12.1
DVDD
  Top 0.279: U1.36 28.52,22.39 26.93,20.79 C10.1
EB0  (via drill 0.3)
  Top 0.305: Q6.2 59.15,23.32 v59.13,23.34 | v61.28,19.21 61.28,18.73 60.03,17.48 D6.A 60.03,15.96 C71.1 60.17,15.3 R60.1
  Signal 0.305: v61.28,19.21 59.13,21.35 v59.13,23.34 62.94,27.14 JP3.7
EB1  (via drill 0.3)
  Top 0.305: R58.1 66.99,11.17 C69.1 66.77,11.75 D8.A 67.15,13.79 Q5.2 v65.88,17.62 65.88,14.19 RB6.2
  Signal 0.305: JP3.6 77.43,25.7 72.48,25.7 65.88,19.1 v65.88,17.62
EB2  (via drill 0.3)
  Top 0.305: Q4.2 v72.71,23.34 71.31,23.34 70.9,22.93 RB5.2 | v74.77,19.21 74.77,18.73 73.52,17.48 D7.A 73.92,17.06 C67.1 73.66,15.3 R56.1
  Signal 0.305: v74.77,19.21 72.71,21.27 v72.71,23.34 72.71,23.65 73.5,24.45 78.72,24.45 JP3.5
EB3  (via drill 0.3)
  Top 0.305: R54.1 80.75,9.37 C65.1 80.35,11.83 D3.A 80.65,13.79 Q3.2 80.5,17.46 v79.38,17.46 79.38,14.19 RB4.2
  Signal 0.305: JP3.4 83.95,24.89 79.38,20.32 v79.38,17.46
EB4  (via drill 0.3)
  Top 0.305: Q2.2 86.05,23.32 v86.04,23.34 84.87,23.34 84.4,22.86 RB3.2 | v88.27,19.21 88.27,18.55 87.17,17.46 D2.A 87.11,17.46 87.42,17.16 C63.1 87.15,15.3 R52.1
  Signal 0.305: v88.27,19.21 88.27,21.11 v86.04,23.34 86.49,23.78 JP3.3
EB5
  Top 0.305: 91.01,19.21 91.01,25.16 JP3.2 | 91.01,19.21 91.01,12.38 RB2.2 | 91.01,19.21 92.61,17.61 Q1.2 94.14,13.79 D1.A 93.76,11.75 C61.1 93.82,11.01 R49.1
EB6
  Top 0.305: JP3.1 92.98,27.14 RB1.2 97.89,25.05 R100.1
FAULTH_N
  Top 0.279: U1.23 30.45,30.6 29.38,31.68 27.42,31.68 26.71,32.39 TP16.1 25.92,33.34 25.92,35.05 C49.2
  Top 0.305: C49.2 26.57,35.98 R14.1 26.57,38.99 R38.1
FAULTH_P
  Top 0.279: U1.24 29.95,30.41 29.12,31.25 26.62,31.25 25.48,32.38 25.48,32.54 | C39.2 25.48,35.04 25.48,32.54 | 25.48,32.54 TP17.1
  Top 0.305: C39.2 24.87,36.02 R14.2 24.87,39.03 R37.1
FAULTL_N
  Top 0.279: U1.18 32.95,30.79 33.83,31.67 35.97,31.67 TP6.1 37.6,33.3 37.6,35.04 C8.2
  Top 0.305: C8.2 36.95,35.98 R3.1 36.95,39.06 R8.1
FAULTL_P
  Top 0.279: U1.17 33.45,30.68 34.01,31.23 36.71,31.23 38.03,32.55 | C5.2 38.03,35.05 38.03,32.55 | TP7.1 38.08,32.5 38.03,32.55
  Top 0.305: C5.2 38.65,36.02 R3.2 38.65,38.95 R7.1
FH1_N
  Top 0.305: R16.2 C50.2
FH1_P
  Top 0.305: R15.2 C51.2
FH2_N
  Top 0.305: C50.1 11.89,45.53 L3.2
FH2_P
  Top 0.305: C51.1 14.95,42.96 L3.1
FH_N
  Top 0.279: R38.2 26.43,40.87 25.82,41.48 25.82,44.48 25.11,45.19 X3.1 24.03,44.48 22.55,44.48 21.68,45.35 R16.1
FH_P
  Top 0.279: R37.2 24.78,40.87 25.39,41.48 25.39,43.01 25.11,43.29 X3.2 24.03,44.01 22.55,44.01 21.7,43.17 R15.1
FL1_N
  Top 0.305: R5.2 C13.2
FL1_P
  Top 0.305: R4.2 C34.2
FL2_N
  Top 0.305: C13.1 50.81,45.53 L1.1
FL2_P
  Top 0.305: C34.1 50.75,43 L1.2
FL_N
  Top 0.279: R8.2 36.84,41 37.54,41.7 37.54,44.45 38.28,45.19 X2.2 38.73,45.19 39.44,44.48 40.65,44.48 41.23,45.05 R5.1
FL_P
  Top 0.279: R7.2 38.81,40.87 38.03,41.65 38.03,43.04 38.28,43.29 X2.1 38.72,43.29 39.44,44.01 40.67,44.01 41.23,43.45 R4.1
GND  (via drill 0.3, 0.35)
  Top 0.279: U1.499 30.45,27.81 U1.26 27.32,27.81 C7.2 | U1.493 30.45,23.31 U1.35 27.55,23.31 26.93,22.69 C10.2 | U1.491 33.95,23.63 U1.45 33.95,20.32 34.92,19.35 34.92,17.8 35.96,16.77 C4.2 | C3.2 31.93,16.47 v31.93,15.32 | U1.15 34.45,27.31 U1.497 | C52.1 28.73,34.09 27.82,33.18 v27.7,33.18 | C36.1 32.77,34.09 31.86,33.18 v31.75,33.18 | C8.1 36.8,34.09 35.9,33.18 v35.8,33.18 | C5.1 38.97,34.14 v39.93,33.18 | C40.1 R29.1 51.33,33.76 v51.91,33.18 51.91,33.25 C25.1 | C57.1 45.19,14.05 v44.05,14.05 42.33,14.05 C58.1 | C59.1 52.09,13.65 v50.64,13.65 | JP20.1 38.17,7.64 v38.15,7.62
  Top 0.305: C11.2 24.86,20.72 v23.65,20.72 | C2.2 25.25,18.81 v23.65,18.81 23.07,19.39 22.54,19.39 C16.1 | C9.2 v29.84,15.32 | C35.1 35.74,33.18 v35.8,33.18 | C53.1 31.71,33.18 v31.75,33.18 | C49.1 27.67,33.18 v27.7,33.18 | X3.3 27.78,43.4 v27.78,42.78 | X2.3 35.56,43.36 v35.56,42.78 | X4.3 29.21,50.49 v29.53,50.8 | X5.3 34.34,50.52 v34.05,50.8 | R73.2 v19.84,21.27 21.14,22.57 C19.1 | R72.2 v17.3,21.27 17.38,21.35 C18.1 | v14.76,21.27 R71.2 | R70.2 v12.22,21.27 13.1,22.15 C74.1 | v23.65,33.18 23.81,33.18 24.69,34.05 C39.1 | v9.68,21.27 R69.2 | v7.14,21.27 R68.2 | D5.A 20.93,34.13 v19.84,34.13 C14.1 | D4.A 19.86,29.07 v19.84,29.05 C15.1 | R64.1 v21.64,7.62 | R67.1 9.15,5.09 J7.2 | R61.1 26.66,6.54 J8.2 | C76.2 C72.2 33.21,3.41 J5.2 | R21.1 v38.15,7.62 | C73.2 C75.2 16.7,3.57 J6.2 | D11.A 7.14,27.96 v7.14,27.94 6.37,27.17 D10.A | D13.A 6.35,38.08 7.12,37.31 v7.14,37.31 8.28,36.17 D12.A | C55.1 v69.16,45.4 | C12.2 27.72,12.48 v27.7,12.46 | v27.7,12.46 27.7,11.25 R6.1 | D9.- 28.66,12.46 v27.7,12.46 | v39.13,20.4 40.27,19.26 C1.1 | C6.2 33.96,16.46 v33.96,15.32
  Signal 0.305: JP6.14 77.55,30.91 77.55,52 J1.1
  pour GND_plane: 1.44,39.45 23.1,39.45 26.04,42.39 26.04,59.13 37.47,59.13 37.47,42.62 40.5,39.59 61.67,39.45 64.06,41.83 64.06,58.98 66.91,61.83 104.54,61.83 104.54,-6.83 104.3,-7.06 -3.73,-7.06 -6.43,-4.37 -6.43,39.36
  pour Top: 30.32,27.94 30.32,23.18 35.08,23.18 35.08,27.94
  pour Signal: 1.44,39.45 23.1,39.45 26.04,42.39 26.04,59.13 37.47,59.13 37.47,42.62 40.5,39.59 61.67,39.45 64.06,41.83 64.06,58.98 66.91,61.83 104.54,61.83 104.54,-6.83 104.3,-7.06 -3.73,-7.06 -6.43,-4.37 -6.43,39.36
  pour Top: -3.49,-7.3 -6.19,-4.6 -6.19,38.89 18.41,38.89 29.05,28.26 36.83,28.26 48.1,39.53 61.75,39.53 64.14,41.91 64.14,59.05 66.83,61.75 104.46,61.75 104.46,-6.83 104.3,-6.99 103.98,-7.3
  pour Bottom: 1.44,39.45 23.1,39.45 26.04,42.39 26.04,59.13 37.47,59.13 37.47,42.62 40.5,39.59 61.67,39.45 64.06,41.83 64.06,58.98 66.91,61.83 104.54,61.83 104.54,-6.83 104.3,-7.06 -3.73,-7.06 -6.43,-4.37 -6.43,39.36
GPIO1
  Top 0.279: U1.27 26.02,27.31 22.86,30.47 22.86,35.4 21.61,36.65 D5.C
  Top 0.305: D5.C 20.93,36.67 R17.1 18.63,36.46 16.93,34.76 C14.2
GPIO1F
  Top 0.305: R17.2 16.93,36.53 15.04,34.64 15.04,31.19 5.98,22.13 5.98,14.81 JP1.2
GPIO1V2
  Top 0.305: J10.2 5.29,18.99 5.29,12.96 JP1.1
GPIO2
  Top 0.279: D4.C 25.72,26.81 U1.28
  Top 0.305: D4.C 20.93,31.59 R18.1 18.63,31.38 16.93,29.68 C15.2
GPIO2F
  Top 0.305: R18.2 16.27,31.59 8.52,23.84 8.52,14.81 JP1.4
GPIO2V1
  Bottom 0.305: J9.2 3.82,12.23 8.57,12.23 JP1.3
GPIO3  (via drill 0.3)
  Top 0.279: U1.29 13.21,26.31 v13.18,26.27 | v7.14,35.56 5.89,35.56 D13.C 3.62,35.58 J11.5
  Top 0.305: R65.1 C74.2 13.18,24.34 v13.18,26.27
  Bottom 0.279: v13.18,26.27 11.11,28.34 11.11,34.13 9.68,35.56 v7.14,35.56
GPIO3F
  Top 0.305: R65.2 11.06,22.54 11.06,14.81 JP1.6
GPIO3T4
  Top 0.305: R67.2 R66.1 12.11,7.57 12.11,7.46 | 12.11,7.46 J7.1 | JP1.5 12.22,7.57 12.11,7.46
GPIO4  (via drill 0.3)
  Top 0.279: U1.30 17.63,25.81 v17.38,25.56 | v9.68,33.58 8.51,33.58 D12.C 3.52,33.67 J11.4
  Top 0.305: R62.1 C18.2 v17.38,25.56
  Bottom 0.279: v17.38,25.56 17.16,25.34 13.13,25.34 10.52,27.94 10.52,32.74 v9.68,33.58
GPIO4F
  Top 0.305: R62.2 16,21.73 16,14.88 JP1.8
GPIO4T3
  Top 0.305: J6.1 19.26,7.2 R64.2 R63.1 17.36,8.52 JP1.7
GPIO5  (via drill 0.3)
  Top 0.279: U1.31 23.14,25.31 v22.94,25.11
  Top 0.305: R22.1 C19.2 22.09,24.27 v22.94,25.11 | v9.68,31.67 8.47,31.67 D11.C 8.39,31.7 J11.3
  Bottom 0.279: v22.94,25.11 22.29,24.47 13.07,24.47 9.93,27.61 9.93,31.42 v9.68,31.67
GPIO5F
  Top 0.305: R22.2 19.4,22.57 18.61,21.78 18.61,14.96 JP1.10
GPIO5T2
  Top 0.305: J8.1 28.6,4.16 R50.1 R61.2 27.06,7.62 26.21,8.47 19.94,8.47 JP1.9
GPIO6  (via drill 0.3)
  Top 0.279: U1.32 23.93,24.81 v22.94,23.81 | v7.14,29.61 7.08,29.67 D10.C 3.53,29.67 J11.2
  Top 0.305: R19.1 22.3,18.15 21.42,19.03 21.42,20.07 22.38,21.03 C16.2 22.94,21.8 v22.94,23.81
  Bottom 0.279: v22.94,23.81 12.94,23.81 v7.14,29.61
GPIO6F
  Top 0.305: R19.2 22.38,16.19 JP1.12
GPIO6T1
  Top 0.305: JP1.11 22.02,8.93 32.34,8.93 33.65,7.62 R20.1 R21.2 35.92,7.04 J5.1
ISO_COMH_N
  Top 0.305: J3.4 3.69,49.87 6.69,49.87 7.76,50.95 L4.3
ISO_COMH_P
  Top 0.305: J3.3 4.78,49.41 6.68,49.41 7.71,48.38 L4.4
ISO_COML_N
  Top 0.305: J2.1 58.76,49.95 56.03,49.95 55.05,50.93 L2.4
ISO_COML_P
  Top 0.305: J2.2 57.51,49.49 56.05,49.49 L2.3
ISO_FAULTH_N
  Top 0.305: J3.2 3.5,46.1 4.29,45.31 7.57,45.31 L3.3
ISO_FAULTH_P
  Top 0.305: J3.1 3.63,44.1 4.3,44.78 7.04,44.78 7.71,44.11 L3.4
ISO_FAULTL_N
  Top 0.305: J2.3 58.65,46.1 57.73,45.18 55.33,45.18 L1.4
ISO_FAULTL_P
  Top 0.305: J2.4 58.27,44.1 57.64,44.72 55.56,44.72 54.88,44.04 L1.3
LDOIN
  Top 0.279: U1.37 29.95,20.74 27.9,18.69 R1.1
N$2
  Top 0.305: R6.2 23.38,11.23 JP4.2
N$3
  Top 0.305: Q1.3 95.09,19.43 RB1.1 92.29,19.71 TP62.1
N$12
  Top 0.305: R73.1 JP2.1
N$19
  Top 0.305: R72.1 JP2.2
N$20
  Top 0.305: R71.1 JP2.3
N$21
  Top 0.305: R70.1 JP2.4
N$22
  Top 0.305: Q3.3 81.6,19.11 RB3.1 78.8,19.79 TP59.1
N$23
  Top 0.305: R69.1 JP2.5
N$24
  Top 0.305: R68.1 JP2.6
N$28
  Top 0.305: R44.1 32.02,11.26 D9.+
N$30
  Top 0.305: TP53.1 97.39,18.96 Q1.1 96.04,13.63 D1.C 96.26,11.75 C61.2 96.04,11.17 R48.1
N$31
  Top 0.305: Q2.3 88.27,20.8 TP61.1 85.47,18 RB2.1
N$34
  Top 0.305: RB5.1 65.33,22.2 | 65.33,22.2 65.88,21.65 68.1,19.43 Q5.3 | 65.33,22.2 65.33,19.76 TP64.1
N$60
  Top 0.305: Q2.1 89.85,22.69 TP54.1 89.85,17.8 D2.C 89.42,17.46 89.11,17.16 C63.2 89.38,15.3 R51.1
N$62
  Top 0.305: TP55.1 83.66,19.05 83.66,18.73 82.86,17.93 82.86,17.92 Q3.1 82.55,13.79 D3.C 82.85,11.83 C65.2 82.45,9.37 R53.1
N$63
  Top 0.305: Q4.3 74.77,20.8 TP60.1 71.97,18 RB4.1
N$68
  Top 0.305: Q4.1 76.36,22.69 TP56.1 76.36,17.8 D7.C 75.62,17.06 C67.2 75.88,15.3 R55.1
N$70
  Top 0.305: TP57.1 70.33,18.88 Q5.1 69.05,13.63 D8.C 69.27,11.75 C69.2 69.22,11.01 R57.1
N$71
  Top 0.305: Q6.3 61.28,20.8 TP63.1 58.48,18 RB6.1
N$76
  Top 0.305: Q6.1 62.87,22.69 TP58.1 62.87,17.8 D6.C 62.53,15.96 62.26,15.69 | 62.26,15.69 C71.2 | R59.1 62.39,15.56 62.26,15.69
NFAULT  (via drill 0.3)
  Top 0.279: U1.42 32.45,19.58 v32.58,19.45 | C59.2 J13.5
  Top 0.305: R45.1 52.13,9.03 J13.5
  Bottom 0.279: v32.58,19.45 33.15,18.88 38.22,18.88 46.14,10.97 50.07,10.97 51.98,9.05 J13.5
REF1
  Top 0.279: C4.1 35.96,18.93 34.45,20.43 U1.46
RX  (via drill 0.3)
  Top 0.279: U1.41 31.95,19.85 v31.55,19.45 | v43.97,12.14 45.19,12.14 R74.2
  Bottom 0.279: v31.55,19.45 32.55,18.45 37.09,18.45 43.39,12.14 v43.97,12.14
RX1
  Top 0.279: R47.1 47.07,5.73 J13.3 47.07,11.96 R74.1 C57.2
SB0
  Top 0.305: R36.1 72.94,39.72 76.33,36.33 JP6.13
SB1
  Top 0.305: R35.1 76.75,39.72 78.87,37.6 JP6.11
SB2
  Top 0.305: R34.1 80.56,39.72 81.41,38.87 JP6.9
SB3
  Top 0.305: R33.1 83.82,32.35 JP6.7
SB4
  Top 0.305: R32.1 87.63,33.36 JP6.5
SB5
  Top 0.305: R31.1 90.89,39.72 89.03,37.85 JP6.3
SB6
  Top 0.305: R30.1 95.25,38.12 91.57,34.44 JP6.1
TSREF  (via drill 0.3)
  Top 0.279: U1.43 32.95,20.06 33.32,19.7 33.32,19.2 32.32,18.2 31.91,18.2 C3.1 32.95,17.16 v32.95,15.32
  Top 0.305: R20.2 R50.2 30,7.62 v31.27,6.35 32.23,5.4 C72.1 C76.1 | C73.1 C75.1 15.56,5.56 v14.61,6.51 13.49,7.62 R66.2 R63.2
  Bottom 0.305: v32.95,15.32 32.95,8.02 v31.27,6.35 14.76,6.35 v14.61,6.51 6.89,6.51 J9.1 2.23,11.16 2.23,17.54 J10.1 2.22,20.07 2.22,26.43 J11.1
TX  (via drill 0.3)
  Top 0.279: U1.40 31.45,20.34 v30.56,19.45
  Bottom 0.279: v30.56,19.45 31.99,18.02 36.91,18.02 43.85,11.07 44.53,10.4 J13.2
VC0
  Top 0.279: U1.14 34.94,29.73 34.94,28.92 35.19,28.67 35.71,28.67 36.27,29.23 37.19,29.23 38.27,30.3 39.27,30.3 TP3.1 | C40.2 C33.1
  Top 0.305: C33.1 44.04,35.46 40.32,31.74 TP3.1 | C40.2 R29.2
VC1
  Top 0.279: U1.12 38.44,29.87 TP2.1 | C33.2 C31.1 45.06,31.75 R28.2
  Top 0.305: C31.1 C32.1 42.39,32.07 40.32,30.01 TP2.1
VC2
  Top 0.279: TP4.1 40.23,28.3 38.81,28.3 37.82,27.31 U1.10 | R27.2 44.8,28.73 C30.1 C31.2
  Top 0.305: C31.2 C32.2 42.39,30.37 40.4,28.39 TP4.1
VC3
  Top 0.279: U1.8 38.09,26.31 38.6,26.82 40.24,26.82 TP9.1 | R26.2 44.8,26.51 C30.2
  Top 0.305: C30.2 42.64,26.62 C29.1 40.35,26.88 TP9.1
VC4
  Top 0.279: U1.6 38.57,25.31 38.6,25.35 40.24,25.35 TP10.1 | R25.2 44.79,23.34 C27.1
  Top 0.305: C27.1 C28.1 C29.2 40.87,24.88 TP10.1
VC5
  Top 0.279: U1.4 38.25,24.31 38.6,23.95 40.31,23.95 TP11.1 | R24.2 45.22,20.48 44.69,19.95 C26.1
  Top 0.305: TP11.1 40.32,23.65 42.39,21.58 C28.2 C27.2 C26.1
VC6
  Top 0.279: U1.2 37.77,23.31 38.62,22.46 TP12.1 | R23.2 44.74,18.26 C26.2
  Top 0.305: C26.2 44.04,18.2 40.32,21.91 TP12.1
VCC
  Top 0.279: R1.2 C2.1
  Top 0.305: R1.2 27.83,15.75 27.9,15.75 29.62,14.03 35.76,14.03 38.02,16.3 R2.2 39.7,16.53 C1.2 46.02,15.96 R23.1 48.39,18.18 C20.2 52.98,18.18 54.75,19.96 59.31,24.52 85.44,24.52 87.76,26.83 87.76,27.45 88.72,28.41 90.3,28.41 JP6.2
  Signal 0.305: J1.4 90.45,51.9 90.45,30.8 JP6.2
VIO  (via drill 0.3)
  Top 0.279: C9.1 29.84,19.72 30.35,20.22 30.63,20.22 30.95,20.55 U1.39 | 26.23,24.31 U1.33
  Top 0.305: C9.1 30.89,17.19 v30.89,15.32 | U1.25 28.49,28.31 26.93,29.87 C7.1 25.77,29.9 v25.72,29.84 | R45.2 v49.21,5.44 | R46.2 v44.53,5.44 R47.2 | C11.1 24.88,23.61 v24.92,23.65 25.58,24.31 26.23,24.31
  Bottom 0.279: 49.61,6.51 J13.4
  Bottom 0.305: 49.61,6.51 49.61,5.44 v49.21,5.44 v44.53,5.44 41.71,5.44 39.85,7.3 39.85,11.75 35.47,16.14 31.68,16.14 31.18,15.63 31.18,15.61 v30.89,15.32 27.72,18.48 27.72,23.95 27.21,24.46 25.72,24.46 | v24.92,23.65 25.72,24.45 25.72,24.46 | 25.72,24.46 v25.72,29.84
VPROG  (via drill 0.35)
  Top 0.279: U1.34 26.75,23.81 v26.51,23.57
  Top 0.305: JP4.1 25.98,13.73 C12.1
  Bottom 0.305: v26.51,23.57 26.51,16.91 JP4.1
WAKEUP  (via drill 0.3)
  Top 0.279: U1.16 33.95,28.71 33.89,28.65 29.53,28.65 v28.57,29.61 | J13.1 41.99,5.73 R46.1 | C58.2 41.97,9.07 J13.1 | J13.1 39.74,9.05 JP20.2
  Bottom 0.279: v28.57,29.61 28.57,20.45 31.43,17.59 35.04,17.59 41.99,10.64 J13.1

## Text on the board
Measures: Ferrite